# EAGLE board Power.Board (EAGLE 6.6.0)
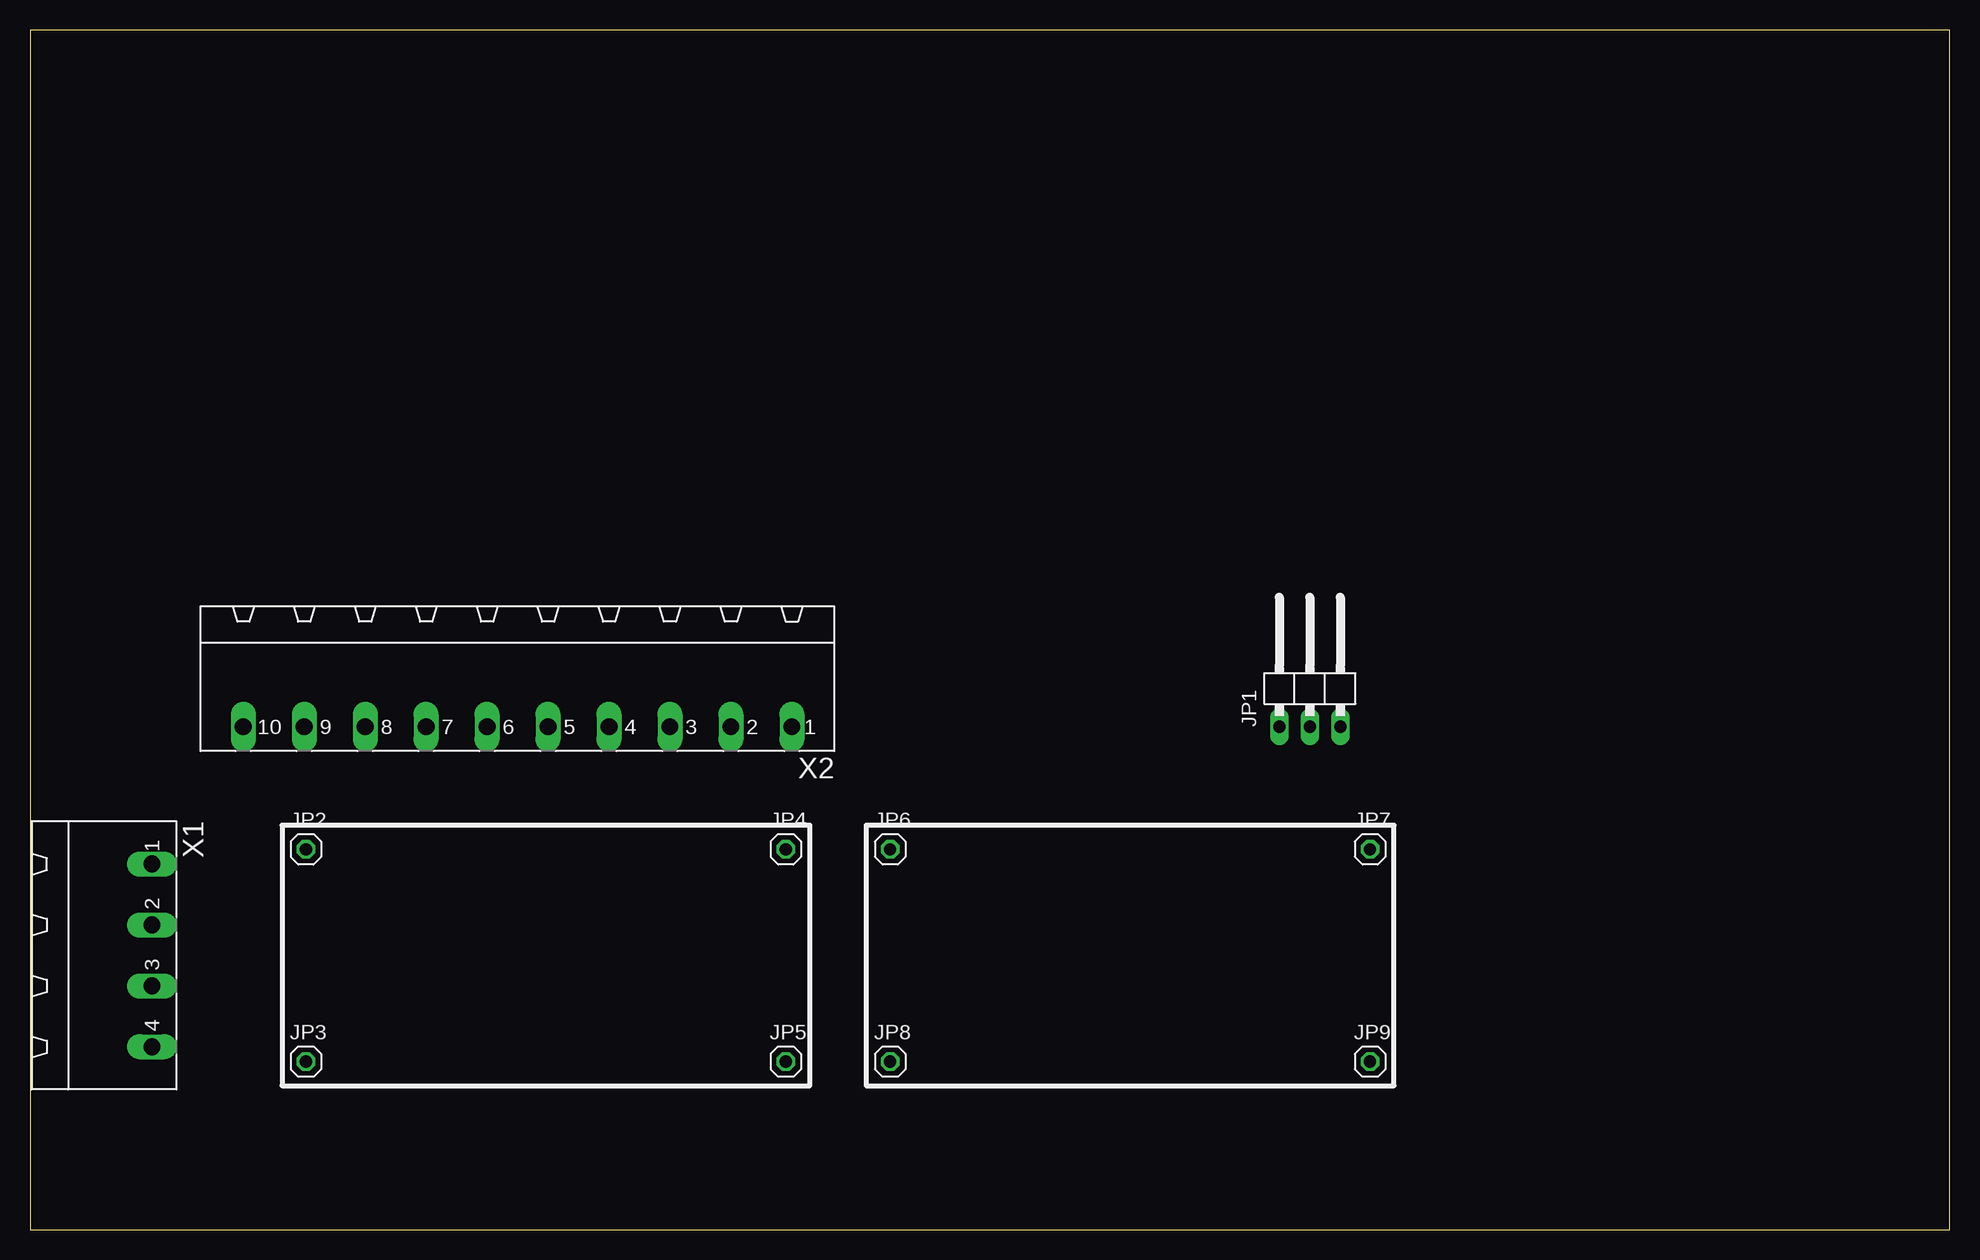
[diagram p0: board, top side]
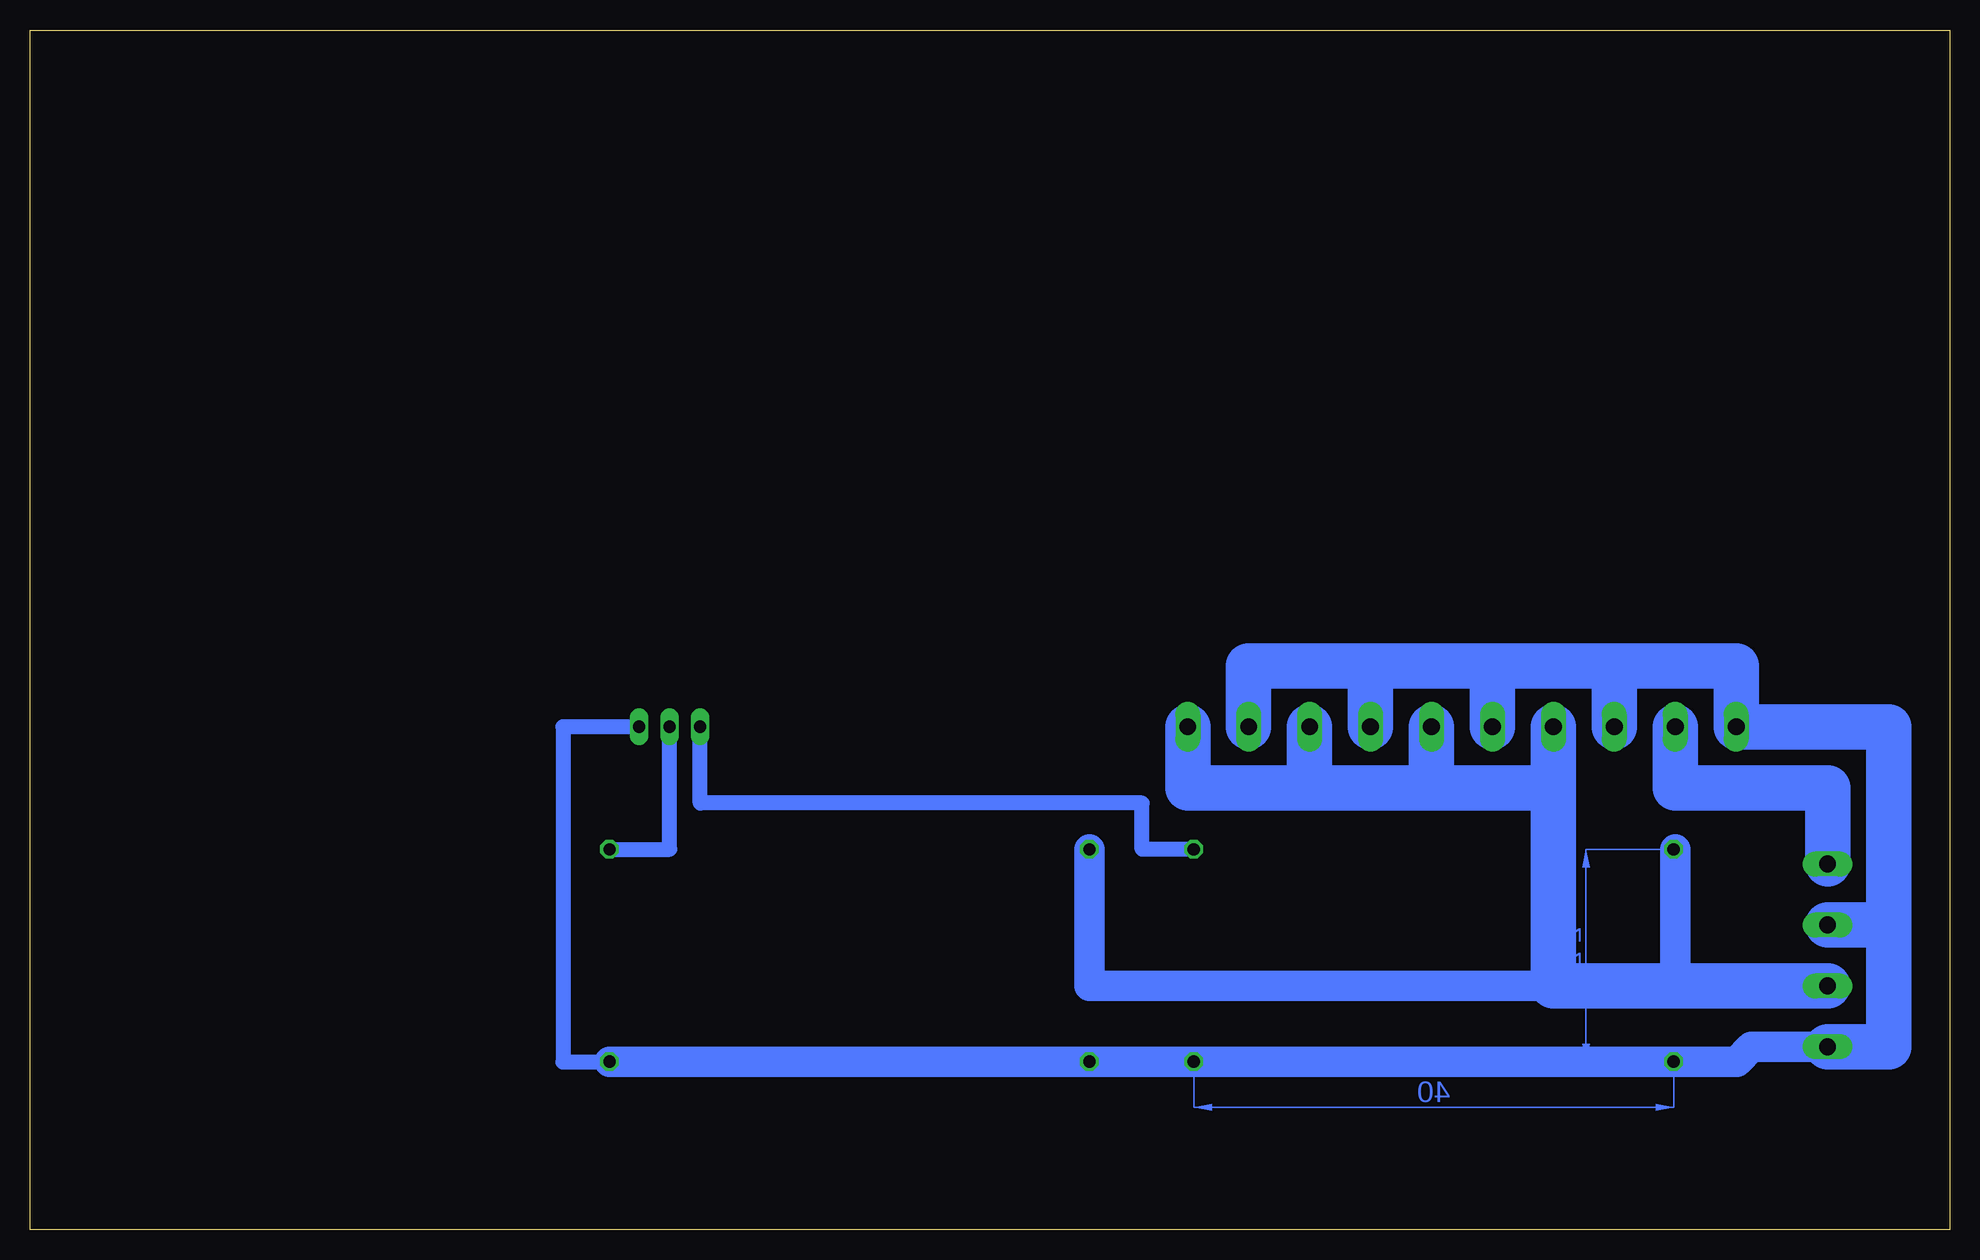
[diagram p1: board, bottom side, seen from below]

Size 160 x 100 mm. Coordinates in mm from the lower left corner, seen from the top.
Outline: 0,0 160,0 160,100 0,100 0,0
Copper layers (1*16): Top 0.035mm / dielectric 1.5mm / Bottom 0.035mm
Design rules "default": minimum track width 10mil, minimum drill 24mil, track to track 8mil, track to pad 8mil, pad to pad 8mil, via to via 8mil, smd to smd 8mil, copper to edge 40mil, drill to drill 8mil, minimum pad ring 10mil, minimum via ring 8mil, stop-mask expansion 4mil, vias tented up to drill 0mil, thermal gap 10mil

## Footprints (pad centres in the part's own frame; a part is rotated, then mirrored left to right if it is on the bottom)
1X03/90 = drill 1.016 long: 1 -2.54,-3.81; 2 0,-3.81; 3 2.54,-3.81
1X01 = drill 1.016 octagon: 1 0,0
MSTBA4 = drill 1.397 long: 1 -7.62,5.08; 2 -2.54,5.08; 3 2.54,5.08; 4 7.62,5.08
MSTBA10 = drill 1.397 long: 1 -22.86,5.08; 2 -17.78,5.08; 3 -12.7,5.08; 4 -7.62,5.08; 5 -2.54,5.08; 6 2.54,5.08; 7 7.62,5.08; 8 12.7,5.08; 9 17.78,5.08; 10 22.86,5.08

## Placement (x,y rotation side)
JP1  [1X03/90]  106.68,45.72 0 top
JP2  [1X01]  23,31.7 0 top
JP3  [1X01]  23,14 0 top
JP4  [1X01]  63,31.7 0 top
JP5  [1X01]  63,14 0 top
JP6  [1X01]  71.7,31.7 0 top
JP7  [1X01]  111.7,31.7 0 top
JP8  [1X01]  71.7,14 0 top
JP9  [1X01]  111.7,14 0 top
X1  MSTBA4  [MSTBA4]  5.08,22.85 270 top
X2  MSTBA10  [MSTBA10]  40.64,46.99 180 top

## Library data of the parts
JP1-JP9 = pinhead
X1 X2 = con-phoenix-508

## Nets
+36V: JP2.1 JP6.1 X1.3 X2.1 X2.3 X2.5 X2.7
+48V: X1.1 X2.9
GND: JP1.3 JP3.1 JP5.1 JP8.1 JP9.1 X1.2 X1.4 X2.2 X2.4 X2.6 X2.8 X2.10
N$4: JP1.1 JP4.1
N$5: JP1.2 JP7.1

## Tracks (layer width: path | path; a pad name or v marks a point on that pad's centre or on a via)
+36V
  Bottom 1.27: 33.02,31.7 33.02,31.75 | JP2.1 22.86,31.7
  Bottom 2.54: X2.7 33.02,36.83 | JP6.1 71.7,20.31 33.02,20.31 | 22.86,31.7 22.86,20.31
  Bottom 3.81: 33.02,36.83 43.18,36.83 | X2.5 43.18,36.83 | 43.18,36.83 53.34,36.83 | X2.3 53.34,36.83 | 53.34,36.83 63.5,36.83 X2.1 | X1.3 22.86,20.31 33.02,20.31 33.02,31.75 X2.7
+48V
  Bottom 3.81: X1.1 10.16,36.83 22.86,36.83 X2.9
GND
  Bottom 1.27: X1.4 | JP1.3 115.57,41.91 115.57,13.97 111.7,13.97 JP9.1
  Bottom 2.54: X1.2 | JP9.1 JP8.1 JP5.1 JP3.1 17.75,14 16.51,15.24 X1.4
  Bottom 3.81: 27.94,46.99 17.78,46.99 X2.10 5.08,41.91 5.08,25.4 | X2.8 27.94,46.99 | 27.94,46.99 38.1,46.99 | X2.2 58.42,46.99 48.26,46.99 | X2.4 48.26,46.99 | 48.26,46.99 38.1,46.99 | 38.1,46.99 X2.6 | X1.4 5.08,15.23 5.08,25.4 | 5.08,25.4 X1.2
N$4
  Bottom 1.27: JP4.1 67.31,31.7 67.31,35.56 104.14,35.56 JP1.1
N$5
  Bottom 1.27: JP7.1 106.68,31.7 JP1.2
(copper drawn outside any net)
  shapes: Bottom area x2